# Allegro board CAD_EX730.brd
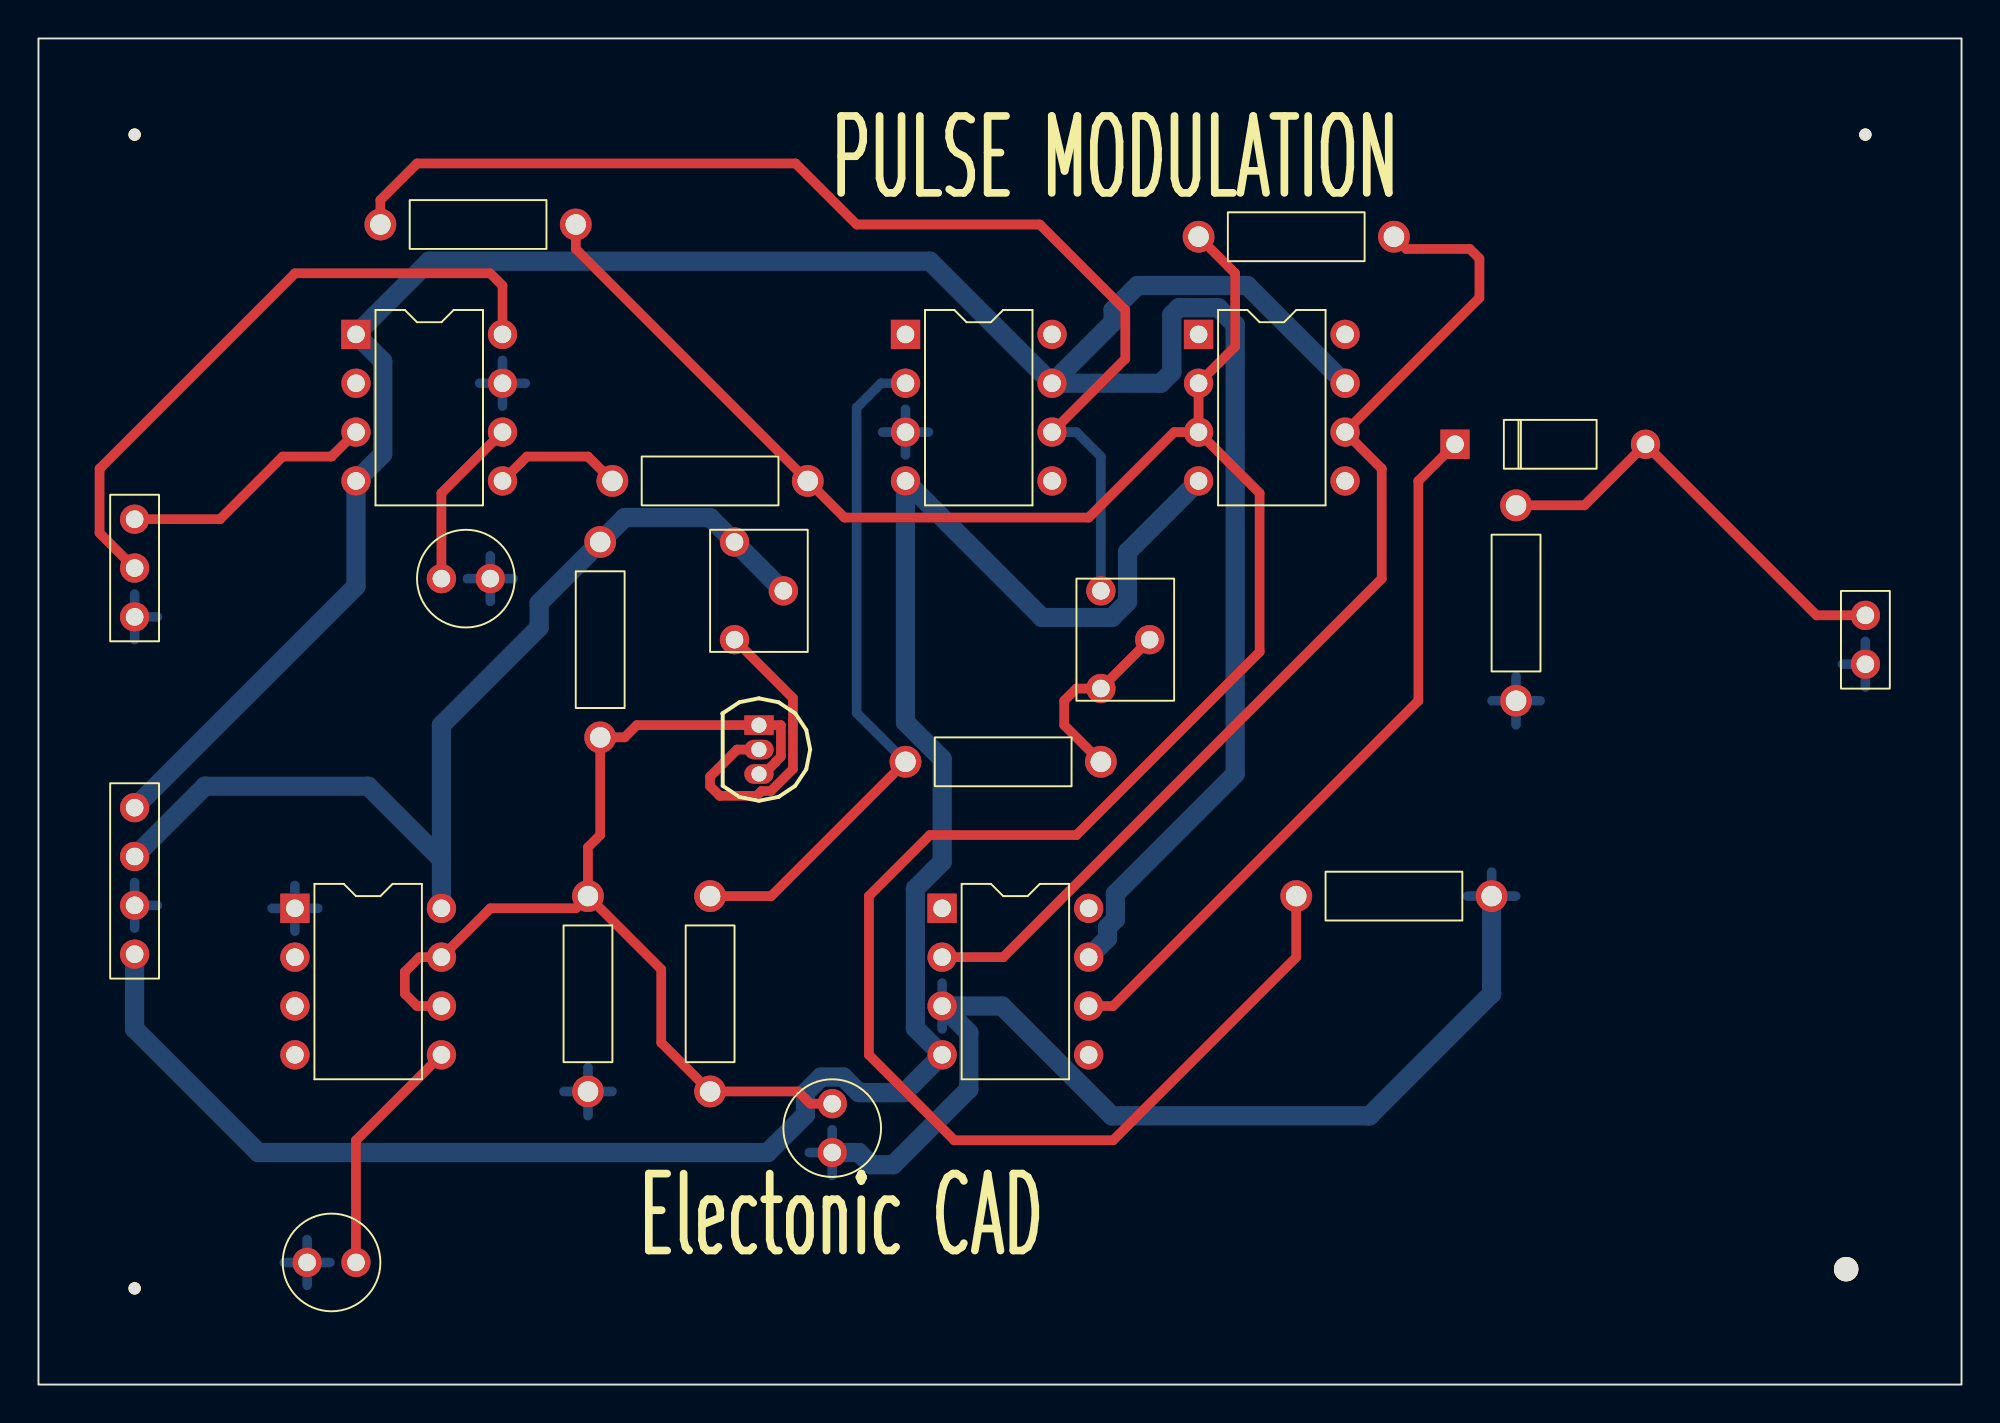
[diagram p0: board, top side]
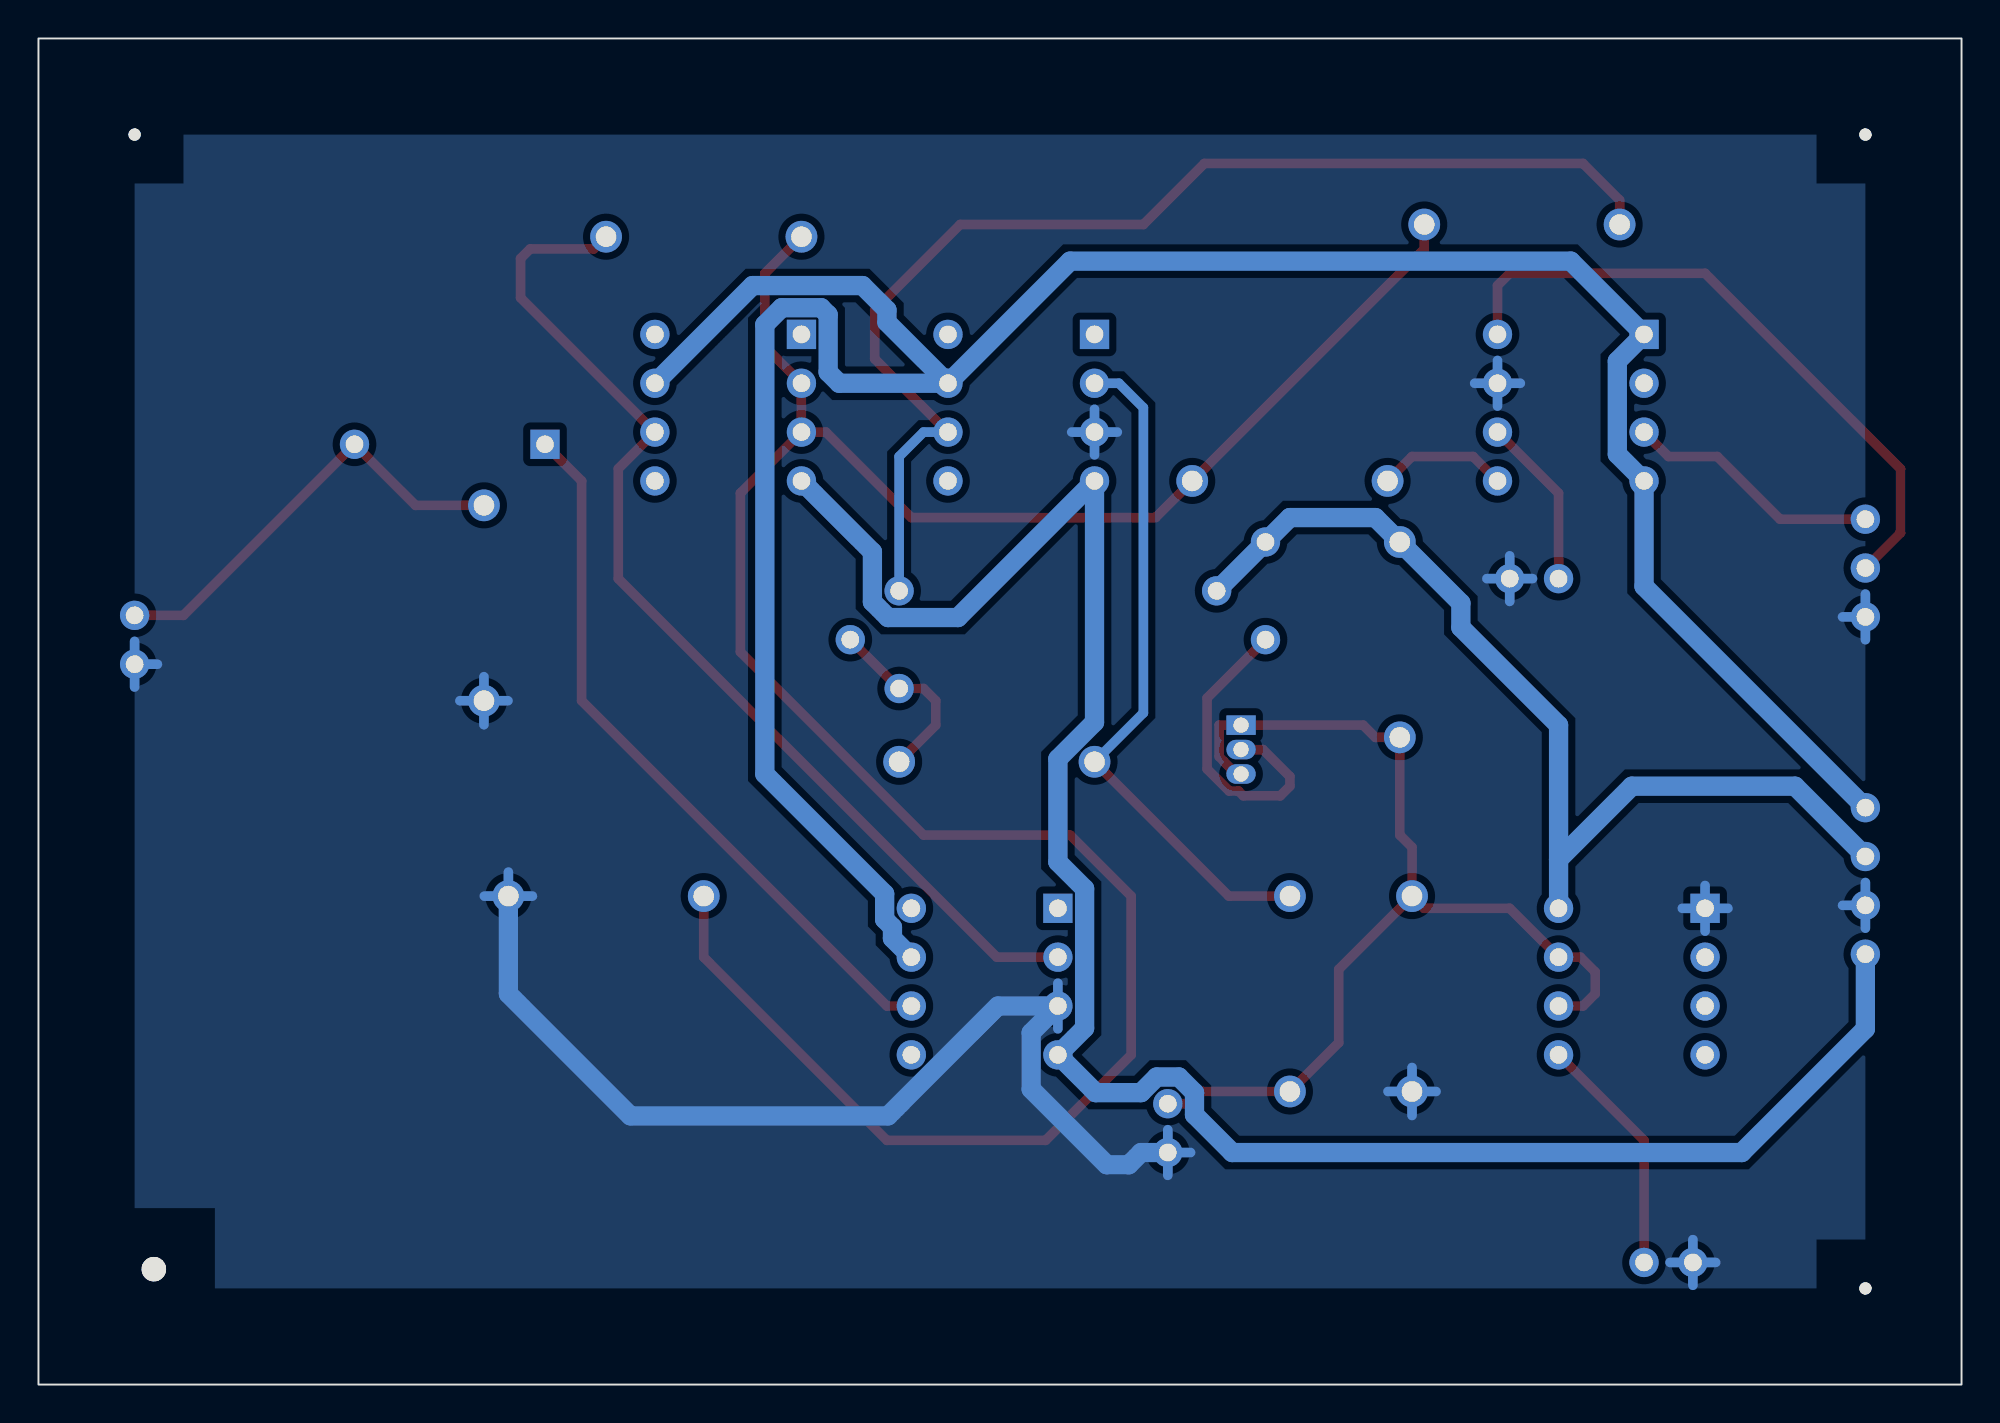
[diagram p1: board, bottom side, seen from below]

Outline 100 x 70 mm; copper layers: TOP, BOTTOM. Coordinates in mm from the lower left corner of the outline.
Outline path: rectangle 0,0 100,70

## Design rules (mm)
constraint set DEFAULT: min track width 0.5

## Placement (name value [footprint] x y rotation side)
C1  0.01uF  [CAP196]  41.27 14.61 180 top
C2  0.01uF  [CAP196]  13.97 6.35 270 top
C3  0.01uF  [CAP196]  20.95 41.91 270 top
D1  d  [DO41]  73.66 48.9 270 top
J1  CON4  [JUMPER4]  5 30 270 top
J2  CON3  [JUMPER3]  5 45 270 top
J3  CON2  [JUMPER2]  95 40 270 top
NOREF  -  [unnamed]  5 65 0 top
NOREF#2  -  [unnamed]  5 5 0 top
NOREF#3  -  [unnamed]  95 65 0 top
NOREF#4  -  [unnamed#2]  94 6 0 top
Q1  25A1015  [TO92]  37.47 34.29 270 top
R1  580  [RES400]  45.09 32.38 270 top
R2  39K  [RES400]  29.21 43.81 180 top
R3  6.2K  [RES400]  34.92 15.24 0 top
R4  100K  [RES400]  28.57 25.4 180 top
R5  10K  [RES400]  17.78 60.33 270 top
R6  10K  [RES400]  60.33 59.69 270 top
R7  10K  [RES400]  29.84 46.99 270 top
R8  10K  [RES400]  75.56 25.4 90 top
R9  10K  [RES400]  76.83 35.56 0 top
U1  NE555  [DIP8_3]  13.34 24.77 0 top
U2  LF356  [DIP8_3]  45.09 54.61 0 top
U3  LF398  [DIP8_3]  16.51 54.61 0 top
U4  LF356  [DIP8_3]  60.33 54.61 0 top
U5  LF356  [DIP8_3]  46.99 24.77 0 top
VR1  5K  [RESADJ]  36.2 38.73 180 top
VR2  20K  [RESADJ]  55.24 36.2 180 top

## Library data of the parts
C1-C3 = CAP NP: Tolerance: ***; User Part Number: ***
D1 = d_0
J1 = CON4_0: User Part Number: ***
J2 = CON3_0: User Part Number: ***
J3 = CON2: User Part Number: ***
Q1 = PNP BCE
R1-R9 = R: Tolerance: ***; User Part Number: ***
U1 = NE555_4: Tolerance: ***; User Part Number: ***
U2 = LF356_3: Tolerance: ***; User Part Number: ***
U3 = LF398: Tolerance: ***; User Part Number: ***
U4 U5 = LF356_2: Tolerance: ***; User Part Number: ***
VR1 VR2 = POT: Tolerance: ***; User Part Number: ***

## Footprints (pads in the part's own frame, mm; a bottom-side part is the same pattern mirrored in y, then rotated)
CAP196
  round 1.524 hole 0.914: 1(0,0) 2(0,2.54)
DIP8_3
  rect 1.524x1.524 hole 0.914: 1(0,0)
  round 1.524 hole 0.914: 2(0,-2.54) 3(0,-5.08) 4(0,-7.62) 5(7.62,-7.62) 6(7.62,-5.08) 7(7.62,-2.54) 8(7.62,0)
DO41
  rect 1.524x1.524 hole 0.914: 1(0,0)
  round 1.524 hole 0.914: 2(0,9.906)
JUMPER2
  round 1.524 hole 0.914: 1(0,0) 2(2.54,0)
JUMPER3
  round 1.524 hole 0.914: 1(0,0) 2(2.54,0) 3(5.08,0)
JUMPER4
  round 1.524 hole 0.914: 1(0,0) 2(2.54,0) 3(5.08,0) 4(7.62,0)
RES400
  round 1.651 hole 1.067: 1(0,0) 2(0,10.16)
RESADJ
  round 1.524 hole 0.914: 1(0,0) 2(-2.54,-2.54) 3(0,-5.08)
TO92
  rect 1.016x1.524 hole 0.787: 1(0,0)
  oval 1.016x1.524 hole 0.787: 2(1.27,0) 3(2.54,0)
unnamed
  round 0.635 hole 3.175 unplated: (0,0)
unnamed#2
  round 1.27 hole 3.962 unplated: (0,0)

## Nets
+5V: J1.2 R2.1 U1.8(VCC) VR1.2(WIPER) VR1.3
+15V: J1.1 U2.7(V5) U3.1 U3.4(VCC-) U4.7 U5.7
-15V: J1.4 U2.4 U4.4(V-) U5.4(V-)
GND: C1.2 C2.1 C3.2 J1.3 J2.3 J3.2 R4.2 R8.1 R9.1 U1.1 U2.3 U3.7 U5.3
CLOCK: U1.2
SIG_1: R5.1 U2.6 VR2.3
N00375: C1.1 Q1.1 Q1.3(E) R2.2 R3.1 R4.1 U1.6 U1.7
N00403: C2.2 U1.5
N00660: Q1.2 VR1.1
N01426: R1.1 R3.2 U2.2
N02047: R1.2 VR2.1 VR2.2(WIPER)
N03268: J2.1 U3.3
N03284: J2.2 U3.8
N03449: C3.1 U3.6
N03576: R7.1 U3.5
N03657: R5.2 R6.1 R7.2 R8.2 U4.2 U4.3
N04198: R6.2 U4.6 U5.2
N04568: D1.1 U5.6
N04574: D1.2 J3.1 R9.2

Pads without a net: U1 3 4; U2 1 5 8; U3 2; U4 1 5 8; U5 1 5 8

## Routing (per net, layer and track width the routed paths; a pad name or vN(x,y) marks a point on that pad's centre or on a via; arc(x,y) is an arc through that point)
+5V: length 53.1
  BOTTOM w1: 20.95,27.3 17.14,31.11 8.65,31.11 J1.2 ; 20.95,27.3 U1.8 ; 20.95,27.3 20.95,34.29 26.04,39.37 26.04,40.64 R2.1 30.48,45.09 34.92,45.09 VR1.3 VR1.2
+15V: length 140.1
  BOTTOM w1: U5.7 55.59,23.21 55.59,23.78 56,24.19 56,25.52 62.23,31.75 62.23,55.12 61.35,56 59.3,56 58.94,55.63 58.94,52.65 58.36,52.07 U2.7 ; U2.7 46.35,58.42 20.32,58.42 U3.1 17.9,53.22 17.9,48.38 U3.4 16.51,41.51 J1.1 ; U2.7 55.88,55.24 55.88,55.88 57.15,57.15 62.87,57.15 67.94,52.07
-15V: length 106.4
  BOTTOM w1: J1.4 5,18.5 11.43,12.06 37.92,12.06 39.89,14.03 39.89,15.18 40.7,15.99 41.85,15.99 42.66,15.18 45.03,15.18 U5.4 45.6,18.53 45.6,25.79 46.99,27.18 46.99,32.53 45.09,34.44 U2.4 52.19,39.89 55.82,39.89 56.63,40.7 56.63,43.3 U4.4
GND: length 106.6
  BOTTOM w0.5: J2.3 6.19,39.92 ; J2.3 5,38.73 ; J2.3 5,41.11 ; 12.15,24.77 U1.1 ; U1.1 13.34,23.58 ; U1.1 13.34,25.95 ; U1.1 14.52,24.77 ; 22.94,52.07 U3.7 ; U3.7 24.13,53.26 ; U3.7 25.32,52.07 ; U3.7 24.13,50.88 ; J1.3 6.19,24.92 ; J1.3 5,23.73 ; J1.3 5,26.11 ; J3.2 95,38.65 ; J3.2 93.81,37.46 ; J3.2 95,36.27 ; U2.3 46.27,49.53 ; U2.3 43.9,49.53 ; U2.3 45.09,48.34 ; U2.3 45.09,50.72 ; 23.5,41.91 23.5,43.1 ; 23.5,41.91 23.5,40.72 ; 23.5,41.91 22.31,41.91 ; 23.5,41.91 24.68,41.91 ; 41.27,12.06 41.27,13.25 ; 41.27,12.06 41.27,10.88 ; 41.27,12.06 40.09,12.06 ; 13.97,5.16 C2.1 ; C2.1 15.16,6.35 ; C2.1 13.97,7.54 ; C2.1 12.78,6.35 ; 75.59,35.56 R9.1 ; R9.1 76.83,34.31 ; R9.1 76.83,36.81 ; R9.1 78.08,35.56 ; R4.2 28.57,16.49 ; R4.2 28.57,13.99 ; R4.2 27.33,15.24 ; R4.2 29.82,15.24 ; R8.1 75.56,26.65 ; R8.1 76.81,25.4 ; R8.1 74.32,25.4 ; 46.99,20.87 46.99,18.5
  BOTTOM w1: R8.1 75.56,20.32 69.22,13.97 55.82,13.97 50.11,19.68 46.99,19.68 48.38,18.3 48.38,15.36 44.45,11.43 43.3,11.43 42.66,12.06 41.27,12.06
SIG_1: length 61.9
  TOP w0.5: U2.6 56.52,53.34 56.52,55.88 52.07,60.33 42.55,60.33 39.37,63.5 19.68,63.5 17.78,61.59 R5.1
  BOTTOM w0.5: U2.6 53.98,49.53 55.24,48.26 VR2.3
N00375: length 55.2
  TOP w0.5: R4.1 28.57,27.94 29.21,28.57 R2.2 30.48,33.66 31.11,34.29 Q1.1 38.6,34.29 38.6,32.65 38.34,32.39 38.34,32.38 37.72,31.75 Q1.3 ; R4.1 27.94,24.77 23.5,24.77 U1.7 19.82,22.23 19.05,21.46 19.05,20.32 19.68,19.68 20.95,19.68 ; R4.1 32.38,21.59 32.38,17.78 R3.1 39.5,15.24 40.14,14.61 C1.1
N00403: length 12.6
  TOP w0.5: U1.5 16.51,12.7 C2.2
N00660: length 16.7
  TOP w0.5: Q1.2 36.33,33.02 34.92,31.62 34.92,31.11 35.42,30.61 37.35,30.61 37.6,30.86 38.09,30.86 39.23,32.01 39.23,35.7 VR1.1
N01426: length 35.6
  TOP w0.5: R1.1 38.1,25.4 R3.2
  BOTTOM w0.5: R1.1 42.55,34.92 42.55,50.8 43.81,52.07 U2.2
N02047: length 9.7
  TOP w0.5: VR2.2 VR2.1 53.98,36.2 53.34,35.56 53.34,34.29 55.24,32.38
N03268: length 13.4
  TOP w0.5: J2.1 9.44,45 12.7,48.26 15.24,48.26 U3.3
N03284: length 33.9
  TOP w0.5: J2.2 3.17,44.28 3.17,47.62 13.34,57.78 23.5,57.78 24.13,57.15 U3.8
N03449: length 8.9
  TOP w0.5: C3.1 20.95,46.35 U3.6
N03576: length 6.8
  TOP w0.5: R7.1 28.57,48.26 25.4,48.26 U3.5
N03657: length 130.8
  TOP w0.5: R8.2 65.41,22.23 55.88,12.7 47.62,12.7 43.18,17.14 43.18,25.4 46.35,28.57 53.98,28.57 63.5,38.1 63.5,46.35 U4.3 ; U4.3 59.05,49.53 54.61,45.09 41.91,45.09 R7.2 27.94,59.05 R5.2 ; U4.3 U4.2 62.23,53.98 62.23,57.78 R6.1
N04198: length 56.3
  TOP w0.5: R6.2 71.12,59.05 74.43,59.05 74.93,58.55 74.93,56.52 67.94,49.53 69.85,47.62 69.85,41.91 50.16,22.23 U5.2
N04568: length 37.8
  TOP w0.5: 54.61,19.68 55.88,19.68 71.75,35.56 71.75,46.99 D1.1
N04574: length 23.2
  TOP w0.5: J3.1 92.46,40 D1.2 80.39,45.72 R9.2

## Copper pours and planes (outline as drawn; the poured copper is in the pictures)
GND on BOTTOM: 5,5 5,65 95,65 95,5

## Text on the board
Ref Des/Silkscreen Top: Electonic CAD | PULSE MODULATION
